# Altium PCB PCB1.PcbDoc (part 2 of 4)
Units mil, origin at the board's own origin, x right, y up, seen from the top; angles counter-clockwise.
Board outline 6000 x 4000 mil, 2 copper layers (Top Layer, Bottom Layer); 7 components, 0 nets, 14 pads, 0 vias.
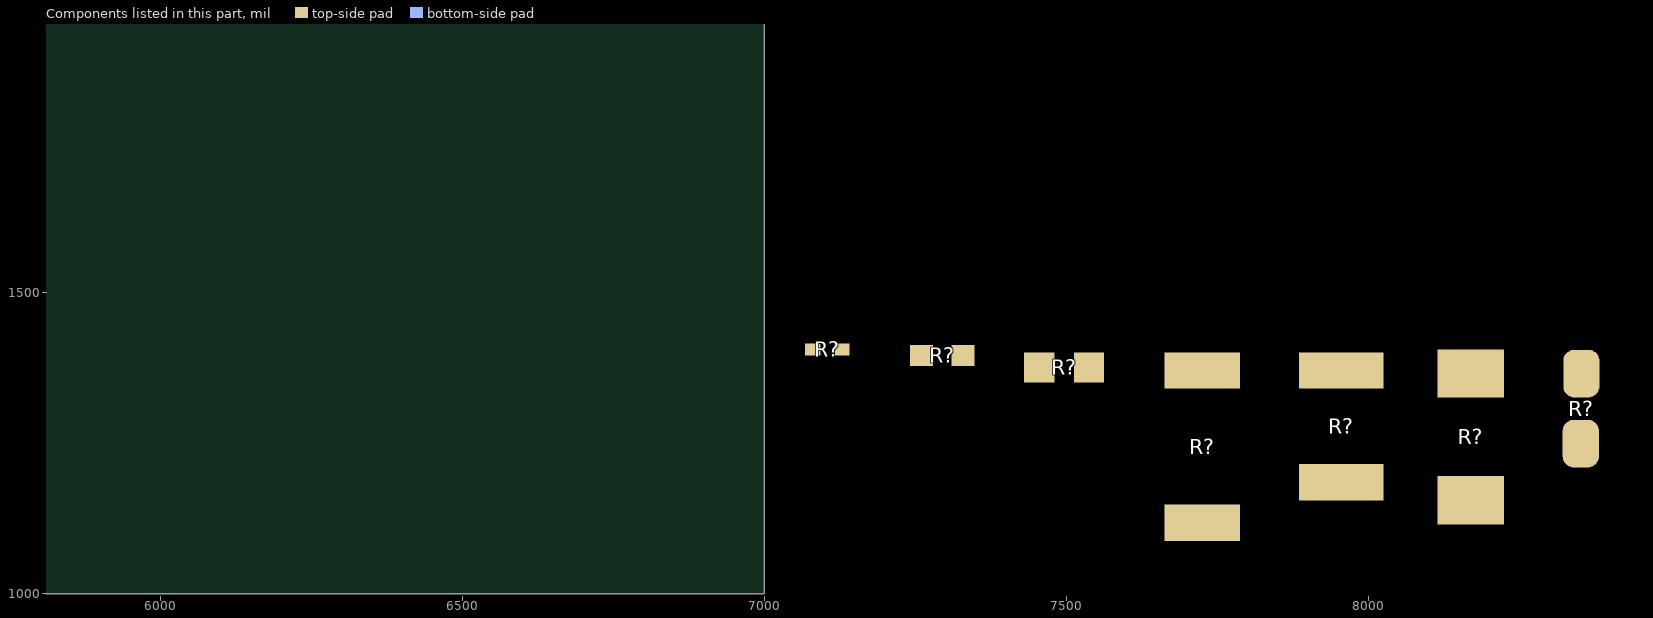
[diagram p2: the components of this part, seen from the top]

## Nets (pads, with @x,y where several pads share a name; then routed paths per layer and width w, separated by ;. In a path a pad name is that pad's centre, name@x,y a point inside that pad or via, vN(x,y) a via of type N, cw(c..) or ccw(c..) an arc to the next point about the centre after c; other vN are vias at no path point) (continued)
copper on no net: (continued)
  Top Layer w1: 5868,1638 5873,1638 ; 5868,1639 5873,1639 ; 5868,1640 5873,1640 ; 5868,1641 5872,1641 ; 5868,1642 5872,1642 ; 5868,1643 5872,1643 ; 5868,1644 5872,1644 ; 5868,1645 5872,1645 ; 5868,1646 5872,1646 ; 5868,1647 5872,1647 ; 5868,1648 5872,1648 ; 5868,1649 5872,1649 ; 5868,1650 5872,1650 ; 5868,1651 5872,1651 ; 5868,1652 5872,1652 ; 5868,1653 5872,1653 ; 5868,1654 5872,1654 ; 5868,1655 5872,1655 ; 5868,1656 5872,1656 ; 5868,1657 5872,1657 ; 5868,1658 5872,1658 ; 5868,1659 5872,1659 ; 5868,1660 5872,1660 ; 5868,1661 5872,1661 ; 5868,1662 5872,1662 ; 5868,1663 5872,1663 ; 5868,1664 5872,1664 ; 5868,1665 5872,1665 ; 5868,1666 5872,1666 ; 5868,1667 5872,1667 ; 5868,1668 5873,1668 ; 5868,1669 5873,1669 ; 5869,1627 5873,1627 ; 5869,1628 5873,1628 ; 5869,1629 5873,1629 ; 5869,1630 5873,1630 ; 5869,1631 5873,1631 ; 5869,1632 5873,1632 ; 5869,1633 5873,1633 ; 5869,1634 5873,1634 ; 5869,1635 5873,1635 ; 5869,1636 5873,1636 ; 5869,1637 5873,1637 ; 5869,1670 5873,1670 ; 5869,1671 5873,1671 ; 5869,1672 5873,1672 ; 5869,1673 5873,1673 ; 5869,1674 5873,1674 ; 5869,1675 5873,1675 ; 5869,1676 5873,1676 ; 5869,1677 5873,1677 ; 5869,1678 5873,1678 ; 5869,1679 5873,1679 ; 5869,1680 5873,1680 ; 5869,1681 5873,1681 ; 5870,1618 5875,1618 ; 5870,1619 5875,1619 ; 5870,1620 5875,1620 ; 5870,1621 5874,1621 ; 5870,1622 5874,1622 ; 5870,1623 5874,1623 ; 5870,1624 5874,1624 ; 5870,1625 5874,1625 ; 5870,1626 5874,1626 ; 5870,1682 5874,1682 ; 5870,1683 5874,1683 ; 5870,1684 5874,1684 ; 5870,1685 5874,1685 ; 5870,1686 5874,1686 ; 5870,1687 5875,1687 ; 5870,1688 5875,1688 ; 5870,1689 5875,1689 ; 5870,1690 5875,1690 ; 5871,1613 5875,1613 ; 5871,1614 5875,1614 ; 5871,1615 5875,1615 ; 5871,1616 5875,1616 ; 5871,1617 5875,1617 ; 5871,1691 5875,1691 ; 5871,1692 5875,1692 ; 5871,1693 5875,1693 ; 5871,1694 5875,1694 ; 5872,1607 5877,1607 ; 5872,1608 5877,1608 ; 5872,1609 5876,1609 ; 5872,1610 5876,1610 ; 5872,1611 5876,1611 ; 5872,1612 5876,1612 ; 5872,1695 5876,1695 ; 5872,1696 5876,1696 ; 5872,1697 5876,1697 ; 5872,1698 5876,1698 ; 5872,1699 5877,1699 ; 5872,1700 5877,1700 ; 5873,1603 5878,1603 ; 5873,1604 5877,1604 ; 5873,1605 5877,1605 ; 5873,1606 5877,1606 ; 5873,1701 5877,1701 ; 5873,1702 5877,1702 ; 5873,1703 5877,1703 ; 5873,1704 5877,1704 ; 5874,1598 5879,1598 ; 5874,1599 5879,1599 ; 5874,1600 5878,1600 ; 5874,1601 5878,1601 ; 5874,1602 5878,1602 ; 5874,1705 5878,1705 ; 5874,1706 5878,1706 ; 5874,1707 5878,1707 ; 5874,1708 5879,1708 ; 5874,1709 5879,1709 ; 5875,1595 5880,1595 ; 5875,1596 5879,1596 ; 5875,1597 5879,1597 ; 5875,1638 5877,1638 ; 5875,1639 5877,1639 ; 5875,1640 5877,1640 ; 5875,1641 5877,1641 ; 5875,1642 5877,1642 ; 5875,1643 5877,1643 ; 5875,1644 5877,1644 ; 5875,1645 5877,1645 ; 5875,1646 5877,1646 ; 5875,1647 5877,1647 ; 5875,1648 5877,1648 ; 5875,1649 5877,1649 ; 5875,1650 5877,1650 ; 5875,1651 5877,1651 ; 5875,1652 5877,1652 ; 5875,1653 5877,1653 ; 5875,1654 5877,1654 ; 5875,1655 5877,1655 ; 5875,1656 5877,1656 ; 5875,1657 5877,1657 ; 5875,1658 5877,1658 ; 5875,1659 5877,1659 ; 5875,1660 5877,1660 ; 5875,1661 5877,1661 ; 5875,1662 5877,1662 ; 5875,1663 5877,1663 ; 5875,1664 5877,1664 ; 5875,1665 5877,1665 ; 5875,1666 5877,1666 ; 5875,1667 5877,1667 ; 5875,1668 5877,1668 ; 5875,1669 5877,1669 ; 5875,1670 5877,1670 ; 5875,1671 5877,1671 ; 5875,1710 5879,1710 ; 5875,1711 5879,1711 ; 5875,1712 5880,1712 ; 5875,1713 5880,1713 ; 5876,1591 5881,1591 ; 5876,1592 5880,1592 ; 5876,1593 5880,1593 ; 5876,1594 5880,1594 ; 5876,1629 5878,1629 ; 5876,1630 5878,1630 ; 5876,1631 5878,1631 ; 5876,1632 5878,1632 ; 5876,1633 5878,1633 ; 5876,1634 5877,1634 ; 5876,1635 5877,1635 ; 5876,1636 5877,1636 ; 5876,1637 5877,1637 ; 5876,1672 5877,1672 ; 5876,1673 5877,1673 ; 5876,1674 5878,1674 ; 5876,1675 5878,1675 ; 5876,1676 5878,1676 ; 5876,1677 5878,1677 ; 5876,1678 5878,1678 ; 5876,1679 5878,1679 ; 5876,1714 5880,1714 ; 5876,1715 5880,1715 ; 5876,1716 5880,1716 ; 5877,1587 5882,1587 ; 5877,1588 5882,1588 ; 5877,1589 5881,1589 ; 5877,1590 5881,1590 ; 5877,1620 5879,1620 ; 5877,1621 5879,1621 ; 5877,1622 5879,1622 ; 5877,1623 5879,1623 ; 5877,1624 5879,1624 ; 5877,1625 5879,1625 ; 5877,1626 5879,1626 ; 5877,1627 5879,1627 ; 5877,1628 5878,1628 ; 5877,1680 5879,1680 ; 5877,1681 5879,1681 ; 5877,1682 5879,1682 ; 5877,1683 5879,1683 ; 5877,1684 5879,1684 ; 5877,1685 5879,1685 ; 5877,1686 5879,1686 ; 5877,1687 5879,1687 ; 5877,1688 5879,1688 ; 5877,1717 5881,1717 ; 5877,1718 5881,1718 ; 5877,1719 5882,1719 ; 5877,1720 5882,1720 ; 5878,1584 5883,1584 ; 5878,1585 5882,1585 ; 5878,1586 5882,1586 ; 5878,1615 5880,1615 ; 5878,1616 5880,1616 ; 5878,1617 5880,1617 ; 5878,1618 5879,1618 ; 5878,1619 5879,1619 ; 5878,1689 5879,1689 ; 5878,1690 5880,1690 ; 5878,1691 5880,1691 ; 5878,1692 5880,1692 ; 5878,1693 5880,1693 ; 5878,1721 5882,1721 ; 5878,1722 5882,1722 ; 5878,1723 5882,1723 ; 5879,1581 5884,1581 ; 5879,1582 5884,1582 ; 5879,1583 5883,1583 ; 5879,1608 5881,1608 ; 5879,1609 5881,1609 ; 5879,1610 5881,1610 ; 5879,1611 5881,1611 ; 5879,1612 5881,1612 ; 5879,1613 5881,1613 ; 5879,1614 5880,1614 ; 5879,1694 5881,1694 ; 5879,1695 5881,1695 ; 5879,1696 5881,1696 ; 5879,1697 5881,1697 ; 5879,1698 5881,1698 ; 5879,1699 5881,1699 ; 5879,1724 5883,1724 ; 5879,1725 5884,1725 ; 5879,1726 5884,1726 ; 5879,1727 5884,1727 ; 5880,1578 5885,1578 ; 5880,1579 5884,1579 ; 5880,1580 5884,1580 ; 5880,1605 5882,1605 ; 5880,1606 5882,1606 ; 5880,1607 5882,1607 ; 5880,1700 5882,1700 ; 5880,1701 5882,1701 ; 5880,1702 5882,1702 ; 5880,1703 5882,1703 ; 5880,1728 5884,1728 ; 5880,1729 5885,1729 ; 5881,1575 5886,1575 ; 5881,1576 5886,1576 ; 5881,1577 5885,1577 ; 5881,1600 5883,1600 ; 5881,1601 5883,1601 ; 5881,1602 5883,1602 ; 5881,1603 5883,1603 ; 5881,1604 5882,1604 ; 5881,1704 5882,1704 ; 5881,1705 5883,1705 ; 5881,1706 5883,1706 ; 5881,1707 5883,1707 ; 5881,1708 5883,1708 ; 5881,1730 5885,1730 ; 5881,1731 5885,1731 ; 5881,1732 5886,1732 ; 5882,1573 5887,1573 ; 5882,1574 5886,1574 ; 5882,1596 5884,1596 ; 5882,1597 5884,1597 ; 5882,1598 5884,1598 ; 5882,1599 5884,1599 ; 5882,1709 5884,1709 ; 5882,1710 5884,1710 ; 5882,1711 5884,1711 ; 5882,1733 5886,1733 ; 5882,1734 5887,1734 ; 5882,1735 5887,1735 ; 5883,1569 5888,1569 ; 5883,1570 5888,1570 ; 5883,1571 5887,1571 ; 5883,1572 5887,1572 ; 5883,1592 5885,1592 ; 5883,1593 5885,1593 ; 5883,1594 5885,1594 ; 5883,1595 5885,1595 ; 5883,1712 5884,1712 ; 5883,1713 5885,1713 ; 5883,1714 5885,1714 ; 5883,1715 5885,1715 ; 5883,1736 5887,1736 ; 5883,1737 5888,1737 ; 5883,1738 5888,1738 ; 5884,1567 5889,1567 ; 5884,1568 5889,1568 ; 5884,1589 5886,1589 ; 5884,1590 5886,1590 ; 5884,1591 5886,1591 ; 5884,1716 5886,1716 ; 5884,1717 5886,1717 ; 5884,1718 5886,1718 ; 5884,1719 5886,1719 ; 5884,1739 5889,1739 ; 5884,1740 5889,1740 ; 5885,1565 5890,1565 ; 5885,1566 5889,1566 ; 5885,1586 5887,1586 ; 5885,1587 5887,1587 ; 5885,1588 5886,1588 ; 5885,1720 5887,1720 ; 5885,1721 5887,1721 ; 5885,1741 5889,1741 ; 5885,1742 5889,1742 ; 5886,1562 5891,1562 ; 5886,1563 5891,1563 ; 5886,1564 5890,1564 ; 5886,1582 5888,1582 ; 5886,1583 5888,1583 ; 5886,1584 5888,1584 ; 5886,1585 5888,1585 ; 5886,1722 5888,1722 ; 5886,1723 5888,1723 ; 5886,1724 5888,1724 ; 5886,1725 5888,1725 ; 5886,1743 5890,1743 ; 5886,1744 5891,1744 ; 5886,1745 5891,1745 ; 5887,1560 5892,1560 ; 5887,1561 5891,1561 ; 5887,1580 5889,1580 ; 5887,1581 5889,1581 ; 5887,1726 5889,1726 ; 5887,1727 5889,1727 ; 5887,1746 5891,1746 ; 5887,1747 5892,1747 ; 5888,1558 5893,1558 ; 5888,1559 5893,1559 ; 5888,1576 5891,1576 ; 5888,1577 5890,1577 ; 5888,1578 5890,1578 ; 5888,1579 5890,1579 ; 5888,1728 5889,1728 ; 5888,1729 5890,1729 ; 5888,1730 5890,1730 ; 5888,1731 5890,1731 ; 5888,1748 5892,1748 ; 5888,1749 5893,1749 ; 5888,1750 5893,1750 ; 5889,1556 5894,1556 ; 5889,1557 5893,1557 ; 5889,1575 5891,1575 ; 5889,1654 5915,1654 ; 5889,1655 5915,1655 ; 5889,1656 5914,1656 ; 5889,1657 5899,1657 ; 5889,1732 5891,1732 ; 5889,1733 5891,1733 ; 5889,1751 5894,1751 ; 5889,1752 5894,1752 ; 5890,1553 5895,1553 ; 5890,1554 5895,1554 ; 5890,1555 5895,1555 ; 5890,1571 5893,1571 ; 5890,1572 5892,1572 ; 5890,1573 5892,1573 ; 5890,1574 5891,1574 ; 5890,1631 5894,1631 ; 5890,1632 5894,1632 ; 5890,1633 5894,1633 ; 5890,1634 5893,1634 ; 5890,1635 5893,1635 ; 5890,1636 5893,1636 ; 5890,1658 5899,1658 ; 5890,1670 5915,1670 ; 5890,1671 5915,1671 ; 5890,1672 5915,1672 ; 5890,1734 5892,1734 ; 5890,1735 5892,1735 ; 5890,1736 5892,1736 ; 5890,1753 5895,1753 ; 5890,1754 5895,1754 ; 5891,1552 5896,1552 ; 5891,1569 5893,1569 ; 5891,1570 5893,1570 ; 5891,1625 5895,1625 ; 5891,1626 5895,1626 ; 5891,1627 5894,1627 ; 5891,1628 5894,1628 ; 5891,1629 5894,1629 ; 5891,1630 5894,1630 ; 5891,1637 5893,1637 ; 5891,1673 5893,1673 ; 5891,1737 5893,1737 ; 5891,1738 5893,1738 ; 5891,1755 5896,1755 ; 5891,1756 5896,1756 ; 5892,1549 5897,1549 ; 5892,1550 5897,1550 ; 5892,1551 5896,1551 ; 5892,1567 5894,1567 ; 5892,1568 5894,1568 ; 5892,1619 5896,1619 ; 5892,1620 5905,1620 ; 5892,1621 5912,1621 ; 5892,1622 5917,1622 ; 5892,1623 5917,1623 ; 5892,1624 5895,1624 ; 5892,1659 5900,1659 ; 5892,1689 5896,1689 ; 5892,1690 5896,1690 ; 5892,1691 5896,1691 ; 5892,1739 5894,1739 ; 5892,1740 5894,1740 ; 5892,1741 5895,1741 ; 5892,1757 5897,1757 ; 5892,1758 5897,1758 ; 5893,1547 5898,1547 ; 5893,1548 5898,1548 ; 5893,1564 5895,1564 ; 5893,1565 5895,1565 ; 5893,1566 5895,1566 ; 5893,1660 5901,1660 ; 5893,1688 5895,1688 ; 5893,1692 5896,1692 ; 5893,1693 5896,1693 ; 5893,1694 5897,1694 ; 5893,1695 5918,1695 ; 5893,1742 5895,1742 ; 5893,1743 5895,1743 ; 5893,1759 5898,1759 ; 5893,1760 5898,1760 ; 5894,1546 5899,1546 ; 5894,1562 5896,1562 ; 5894,1563 5896,1563 ; 5894,1696 5914,1696 ; 5894,1697 5909,1697 ; 5894,1698 5904,1698 ; 5894,1699 5900,1699 ; 5894,1700 5898,1700 ; 5894,1744 5896,1744 ; 5894,1745 5896,1745 ; 5894,1761 5899,1761 ; 5894,1762 5899,1762 ; 5895,1543 5900,1543 ; 5895,1544 5900,1544 ; 5895,1545 5899,1545 ; 5895,1560 5897,1560 ; 5895,1561 5897,1561 ; 5895,1661 5903,1661 ; 5895,1701 5898,1701 ; 5895,1702 5898,1702 ; 5895,1703 5898,1703 ; 5895,1704 5899,1704 ; 5895,1705 5899,1705 ; 5895,1746 5897,1746 ; 5895,1747 5897,1747 ; 5895,1748 5897,1748 ; 5895,1763 5900,1763 ; 5895,1764 5900,1764 ; 5896,1542 5901,1542 ; 5896,1558 5898,1558 ; 5896,1559 5898,1559 ; 5896,1706 5899,1706 ; 5896,1707 5899,1707 ; 5896,1749 5898,1749 ; 5896,1750 5899,1750 ; 5896,1765 5901,1765 ; 5897,1540 5902,1540 ; 5897,1541 5902,1541 ; 5897,1555 5900,1555 ; 5897,1556 5899,1556 ; 5897,1557 5899,1557 ; 5897,1594 5901,1594 ; 5897,1595 5901,1595 ; 5897,1596 5901,1596 ; 5897,1597 5901,1597 ; 5897,1598 5902,1598 ; 5897,1599 5902,1599 ; 5897,1662 5905,1662 ; 5897,1751 5899,1751 ; 5897,1752 5899,1752 ; 5897,1766 5902,1766 ; 5897,1767 5902,1767 ; 5897,1768 5903,1768 ; 5898,1538 5903,1538 ; 5898,1539 5903,1539 ; 5898,1554 5900,1554 ; 5898,1592 5902,1592 ; 5898,1593 5902,1593 ; 5898,1600 5903,1600 ; 5898,1601 5904,1601 ; 5898,1753 5900,1753 ; 5898,1754 5900,1754 ; 5898,1769 5903,1769 ; 5899,1536 5905,1536 ; 5899,1537 5904,1537 ; 5899,1552 5907,1552 ; 5899,1553 5910,1553 ; 5899,1590 5904,1590 ; 5899,1591 5903,1591 ; 5899,1602 5903,1602 ; 5899,1663 5907,1663 ; 5899,1755 5901,1755 ; 5899,1756 5901,1756 ; 5899,1770 5904,1770 ; 5899,1771 5904,1771 ; 5900,1535 5905,1535 ; 5900,1550 5903,1550 ; 5900,1551 5905,1551 ; 5900,1589 5906,1589 ; 5900,1603 5902,1603 ; 5900,1635 5904,1635 ; 5900,1636 5904,1636 ; 5900,1653 5915,1653 ; 5900,1757 5902,1757 ; 5900,1758 5902,1758 ; 5900,1772 5905,1772 ; 5900,1773 5905,1773 ; 5901,1533 5906,1533 ; 5901,1534 5906,1534 ; 5901,1548 5903,1548 ; 5901,1549 5903,1549 ; 5901,1587 5918,1587 ; 5901,1588 5919,1588 ; 5901,1604 5902,1604 ; 5901,1624 5917,1624 ; 5901,1628 5905,1628 ; 5901,1629 5905,1629 ; 5901,1630 5905,1630 ; 5901,1631 5904,1631 ; 5901,1632 5904,1632 ; 5901,1633 5904,1633 ; 5901,1634 5904,1634 ; 5901,1637 5904,1637 ; 5901,1664 5909,1664 ; 5901,1669 5903,1669 ; 5901,1722 5916,1722 ; 5901,1723 5909,1723 ; 5901,1724 5907,1724 ; 5901,1759 5903,1759 ; 5901,1760 5904,1760 ; 5901,1774 5906,1774 ; 5902,1531 5908,1531 ; 5902,1532 5907,1532 ; 5902,1546 5904,1546 ; 5902,1547 5904,1547 ; 5902,1625 5906,1625 ; 5902,1626 5905,1626 ; 5902,1627 5905,1627 ; 5902,1665 5911,1665 ; 5902,1725 5906,1725 ; 5902,1726 5906,1726 ; 5902,1727 5906,1727 ; 5902,1761 5904,1761 ; 5902,1762 5904,1762 ; 5902,1775 5907,1775 ; 5902,1776 5907,1776 ; 5903,1530 5908,1530 ; 5903,1544 5906,1544 ; 5903,1545 5905,1545 ; 5903,1586 5916,1586 ; 5903,1694 5919,1694 ; 5903,1721 5916,1721 ; 5903,1728 5906,1728 ; 5903,1729 5907,1729 ; 5903,1763 5905,1763 ; 5903,1777 5908,1777 ; 5904,1528 5909,1528 ; 5904,1529 5909,1529 ; 5904,1542 5911,1542 ; 5904,1543 5913,1543 ; 5904,1554 5912,1554 ; 5904,1730 5907,1730 ; 5904,1731 5908,1731 ; 5904,1732 5908,1732 ; 5904,1764 5906,1764 ; 5904,1765 5906,1765 ; 5904,1778 5909,1778 ; 5904,1779 5909,1779 ; 5905,1527 5910,1527 ; 5905,1541 5909,1541 ; 5905,1666 5912,1666 ; 5905,1669 5915,1669 ; 5905,1733 5909,1733 ; 5905,1734 5909,1734 ; 5905,1766 5907,1766 ; 5905,1767 5908,1767 ; 5905,1780 5910,1780 ; 5905,1781 5911,1781 ; 5906,1525 5912,1525 ; 5906,1526 5911,1526 ; 5906,1539 5908,1539 ; 5906,1540 5908,1540 ; 5906,1555 5915,1555 ; 5906,1585 5912,1585 ; 5906,1667 5914,1667 ; 5906,1668 5915,1668 ; 5906,1720 5917,1720 ; 5906,1735 5918,1735 ; 5906,1736 5918,1736 ; 5906,1768 5908,1768 ; 5906,1769 5909,1769 ; 5906,1782 5911,1782 ; 5907,1524 5912,1524 ; 5907,1537 5909,1537 ; 5907,1538 5909,1538 ; 5907,1693 5919,1693 ; 5907,1737 5917,1737 ; 5907,1770 5909,1770 ; 5907,1783 5912,1783 ; 5907,1784 5913,1784 ; 5908,1522 5914,1522 ; 5908,1523 5913,1523 ; 5908,1535 5911,1535 ; 5908,1536 5910,1536 ; 5908,1544 5915,1544 ; 5908,1719 5920,1719 ; 5908,1738 5916,1738 ; 5908,1771 5910,1771 ; 5908,1772 5911,1772 ; 5908,1785 5913,1785 ; 5909,1521 5914,1521 ; 5909,1534 5912,1534 ; 5909,1556 5917,1556 ; 5909,1773 5911,1773 ; 5909,1774 5912,1774 ; 5909,1786 5914,1786 ; 5909,1787 5915,1787 ; 5910,1519 5916,1519 ; 5910,1520 5915,1520 ; 5910,1532 5915,1532 ; 5910,1533 5918,1533 ; 5910,1545 5917,1545 ; 5910,1589 5921,1589 ; 5910,1739 5913,1739 ; 5910,1775 5912,1775 ; 5910,1788 5916,1788 ; 5911,1518 5917,1518 ; 5911,1531 5914,1531 ; 5911,1557 5920,1557 ; 5911,1625 5917,1625 ; 5911,1718 5922,1718 ; 5911,1776 5913,1776 ; 5911,1777 5914,1777 ; 5911,1789 5916,1789 ; 5911,1790 5917,1790 ; 5912,1517 5917,1517 ; 5912,1529 5914,1529 ; 5912,1530 5914,1530 ; 5912,1546 5919,1546 ; 5912,1634 5916,1634 ; 5912,1635 5916,1635 ; 5912,1636 5916,1636 ; 5912,1637 5915,1637 ; 5912,1638 5915,1638 ; 5912,1639 5915,1639 ; 5912,1640 5915,1640 ; 5912,1692 5919,1692 ; 5912,1717 5925,1717 ; 5912,1778 5914,1778 ; 5912,1791 5918,1791 ; 5913,1515 5919,1515 ; 5913,1516 5918,1516 ; 5913,1528 5915,1528 ; 5913,1534 5919,1534 ; 5913,1604 5921,1604 ; 5913,1605 5921,1605 ; 5913,1606 5919,1606 ; 5913,1607 5918,1607 ; 5913,1626 5917,1626 ; 5913,1627 5917,1627 ; 5913,1628 5916,1628 ; 5913,1629 5916,1629 ; 5913,1630 5916,1630 ; 5913,1631 5916,1631 ; 5913,1632 5916,1632 ; 5913,1633 5916,1633 ; 5913,1723 5916,1723 ; 5913,1724 5917,1724 ; 5913,1779 5915,1779 ; 5913,1780 5916,1780 ; 5913,1792 5918,1792 ; 5914,1514 5920,1514 ; 5914,1526 5917,1526 ; 5914,1527 5916,1527 ; 5914,1535 5921,1535 ; 5914,1547 5921,1547 ; 5914,1558 5922,1558 ; 5914,1590 5921,1590 ; 5914,1725 5918,1725 ; 5914,1726 5920,1726 ; 5914,1734 5918,1734 ; 5914,1781 5916,1781 ; 5914,1793 5919,1793 ; 5915,1512 5921,1512 ; 5915,1513 5920,1513 ; 5915,1525 5917,1525 ; 5915,1727 5922,1727 ; 5915,1728 5928,1728 ; 5915,1729 5930,1729 ; 5915,1730 5931,1730 ; 5915,1731 5918,1731 ; 5915,1732 5918,1732 ; 5915,1733 5918,1733 ; 5915,1782 5917,1782 ; 5915,1783 5918,1783 ; 5915,1794 5920,1794 ; 5915,1795 5921,1795 ; 5916,1511 5922,1511 ; 5916,1524 5924,1524 ; 5916,1536 5923,1536 ; 5916,1548 5923,1548 ; 5916,1559 5924,1559 ; 5916,1591 5922,1591 ; 5916,1603 5922,1603 ; 5916,1691 5918,1691 ; 5916,1716 5925,1716 ; 5916,1784 5919,1784 ; 5916,1796 5922,1796 ; 5917,1510 5923,1510 ; 5917,1522 5921,1522 ; 5917,1523 5922,1523 ; 5917,1592 5923,1592 ; 5917,1785 5919,1785 ; 5917,1786 5920,1786 ; 5917,1797 5923,1797 ; 5917,1798 5923,1798 ; 5918,1509 5924,1509 ; 5918,1521 5920,1521 ; 5918,1537 5925,1537 ; 5918,1549 5925,1549 ; 5918,1560 5927,1560 ; 5918,1593 5923,1593 ; 5918,1602 5922,1602 ; 5918,1715 5925,1715 ; 5918,1787 5921,1787 ; 5918,1799 5924,1799 ; 5919,1507 5925,1507 ; 5919,1508 5924,1508 ; 5919,1519 5922,1519 ; 5919,1520 5921,1520 ; 5919,1525 5925,1525 ; 5919,1594 5923,1594 ; 5919,1600 5923,1600 ; 5919,1601 5923,1601 ; 5919,1762 5948,1762 ; 5919,1788 5921,1788 ; 5919,1800 5925,1800 ; 5920,1506 5926,1506 ; 5920,1518 5922,1518 ; 5920,1538 5926,1538 ; 5920,1550 5927,1550 ; 5920,1595 5923,1595 ; 5920,1596 5923,1596 ; 5920,1597 5924,1597 ; 5920,1598 5924,1598 ; 5920,1599 5923,1599 ; 5920,1761 5926,1761 ; 5920,1763 5942,1763 ; 5920,1764 5937,1764 ; 5920,1789 5922,1789 ; 5920,1790 5923,1790 ; 5920,1801 5926,1801 ; 5921,1505 5927,1505 ; 5921,1517 5923,1517 ; 5921,1526 5927,1526 ; 5921,1539 5928,1539 ; 5921,1561 5929,1561 ; 5921,1641 5923,1641 ; 5921,1642 5923,1642 ; 5921,1643 5923,1643 ; 5921,1644 5923,1644 ; 5921,1645 5923,1645 ; 5921,1646 5923,1646 ; 5921,1647 5923,1647 ; 5921,1648 5923,1648 ; 5921,1649 5923,1649 ; 5921,1650 5923,1650 ; 5921,1651 5923,1651 ; 5921,1652 5923,1652 ; 5921,1653 5923,1653 ; 5921,1654 5923,1654 ; 5921,1655 5923,1655 ; 5921,1656 5923,1656 ; 5921,1657 5923,1657 ; 5921,1658 5923,1658 ; 5921,1659 5923,1659 ; 5921,1660 5923,1660 ; 5921,1661 5923,1661 ; 5921,1662 5923,1662 ; 5921,1663 5923,1663 ; 5921,1664 5923,1664 ; 5921,1665 5923,1665 ; 5921,1666 5923,1666 ; 5921,1714 5925,1714 ; 5921,1760 5926,1760 ; 5921,1765 5930,1765 ; 5921,1766 5925,1766 ; 5921,1791 5924,1791 ; 5921,1802 5927,1802 ; 5922,1504 5928,1504 ; 5922,1515 5931,1515 ; 5922,1516 5924,1516 ; 5922,1551 5929,1551 ; 5922,1630 5924,1630 ; 5922,1631 5924,1631 ; 5922,1632 5924,1632 ; 5922,1633 5924,1633 ; 5922,1634 5924,1634 ; 5922,1635 5924,1635 ; 5922,1636 5924,1636 ; 5922,1637 5924,1637 ; 5922,1638 5923,1638 ; 5922,1639 5923,1639 ; 5922,1640 5923,1640 ; 5922,1667 5923,1667 ; 5922,1668 5923,1668 ; 5922,1669 5923,1669 ; 5922,1670 5924,1670 ; 5922,1671 5924,1671 ; 5922,1672 5924,1672 ; 5922,1673 5924,1673 ; 5922,1674 5924,1674 ; 5922,1675 5924,1675 ; 5922,1676 5924,1676 ; 5922,1677 5924,1677 ; 5922,1713 5924,1713 ; 5922,1731 5931,1731 ; 5922,1758 5927,1758 ; 5922,1759 5927,1759 ; 5922,1792 5924,1792 ; 5922,1803 5927,1803 ; 5922,1804 5928,1804 ; 5923,1503 5929,1503 ; 5923,1514 5929,1514 ; 5923,1527 5929,1527 ; 5923,1562 5932,1562 ; 5923,1624 5925,1624 ; 5923,1625 5925,1625 ; 5923,1626 5925,1626 ; 5923,1627 5925,1627 ; 5923,1628 5925,1628 ; 5923,1629 5925,1629 ; 5923,1678 5924,1678 ; 5923,1679 5925,1679 ; 5923,1680 5925,1680 ; 5923,1681 5925,1681 ; 5923,1682 5925,1682 ; 5923,1683 5925,1683 ; 5923,1757 5928,1757 ; 5923,1793 5925,1793 ; 5923,1805 5929,1805 ; 5924,1501 5931,1501 ; 5924,1502 5930,1502 ; 5924,1513 5928,1513 ; 5924,1528 5930,1528 ; 5924,1540 5930,1540 ; 5924,1552 5931,1552 ; 5924,1618 5926,1618 ; 5924,1619 5926,1619 ; 5924,1620 5926,1620 ; 5924,1621 5926,1621 ; 5924,1622 5926,1622 ; 5924,1623 5925,1623 ; 5924,1684 5925,1684 ; 5924,1685 5925,1685 ; 5924,1686 5926,1686 ; 5924,1687 5926,1687 ; 5924,1688 5926,1688 ; 5924,1689 5926,1689 ; 5924,1756 5929,1756 ; 5924,1794 5926,1794 ; 5924,1795 5927,1795 ; 5924,1806 5930,1806 ; 5925,1500 5931,1500 ; 5925,1512 5927,1512 ; 5925,1541 5932,1541 ; 5925,1614 5927,1614 ; 5925,1615 5927,1615 ; 5925,1616 5927,1616 ; 5925,1617 5927,1617 ; 5925,1690 5926,1690 ; 5925,1691 5927,1691 ; 5925,1692 5927,1692 ; 5925,1693 5927,1693 ; 5925,1732 5932,1732 ; 5925,1755 5930,1755 ; 5925,1796 5928,1796 ; 5925,1807 5931,1807 ; 5926,1499 5932,1499 ; 5926,1510 5929,1510 ; 5926,1511 5928,1511 ; 5926,1516 5932,1516 ; 5926,1529 5932,1529 ; 5926,1553 5934,1553 ; 5926,1563 5934,1563 ; 5926,1610 5928,1610 ; 5926,1611 5928,1611 ; 5926,1612 5928,1612 ; 5926,1613 5927,1613 ; 5926,1650 5951,1650 ; 5926,1651 5951,1651 ; 5926,1652 5951,1652 ; 5926,1653 5951,1653 ; 5926,1654 5951,1654 ; 5926,1655 5951,1655 ; 5926,1656 5951,1656 ; 5926,1657 5952,1657 ; 5926,1694 5927,1694 ; 5926,1695 5928,1695 ; 5926,1696 5928,1696 ; 5926,1697 5928,1697 ; 5926,1698 5928,1698 ; 5926,1753 5936,1753 ; 5926,1754 5931,1754 ; 5926,1797 5928,1797 ; 5926,1808 5932,1808 ; 5927,1498 5933,1498 ; 5927,1509 5930,1509 ; 5927,1530 5934,1530 ; 5927,1542 5934,1542 ; 5927,1606 5929,1606 ; 5927,1607 5929,1607 ; 5927,1608 5929,1608 ; 5927,1609 5928,1609 ; 5927,1636 5955,1636 ; 5927,1637 5954,1637 ; 5927,1638 5954,1638 ; 5927,1639 5953,1639 ; 5927,1640 5953,1640 ; 5927,1641 5952,1641 ; 5927,1642 5952,1642 ; 5927,1643 5952,1643 ; 5927,1644 5951,1644 ; 5927,1645 5951,1645 ; 5927,1646 5951,1646 ; 5927,1647 5951,1647 ; 5927,1648 5951,1648 ; 5927,1649 5951,1649 ; 5927,1658 5952,1658 ; 5927,1659 5952,1659 ; 5927,1660 5952,1660 ; 5927,1661 5953,1661 ; 5927,1662 5953,1662 ; 5927,1663 5954,1663 ; 5927,1664 5954,1664 ; 5927,1665 5954,1665 ; 5927,1666 5955,1666 ; 5927,1667 5956,1667 ; 5927,1668 5956,1668 ; 5927,1669 5957,1669 ; 5927,1670 5957,1670 ; 5927,1671 5958,1671 ; 5927,1699 5929,1699 ; 5927,1700 5929,1700 ; 5927,1701 5929,1701 ; 5927,1702 5929,1702 ; 5927,1752 5936,1752 ; 5927,1798 5929,1798 ; 5927,1809 5933,1809 ; 5928,1497 5934,1497 ; 5928,1508 5930,1508 ; 5928,1517 5933,1517 ; 5928,1564 5936,1564 ; 5928,1602 5930,1602 ; 5928,1603 5930,1603 ; 5928,1604 5930,1604 ; 5928,1605 5929,1605 ; 5928,1627 5963,1627 ; 5928,1628 5962,1628 ; 5928,1629 5961,1629 ; 5928,1630 5960,1630 ; 5928,1631 5959,1631 ; 5928,1632 5958,1632 ; 5928,1633 5957,1633 ; 5928,1634 5956,1634 ; 5928,1635 5956,1635 ; 5928,1672 5959,1672 ; 5928,1673 5959,1673 ; 5928,1674 5960,1674 ; 5928,1675 5961,1675 ; 5928,1676 5962,1676 ; 5928,1677 5963,1677 ; 5928,1678 5964,1678 ; 5928,1679 5965,1679 ; 5928,1680 5966,1680 ; 5928,1703 5930,1703 ; 5928,1704 5930,1704 ; 5928,1705 5930,1705 ; 5928,1750 5934,1750 ; 5928,1751 5935,1751 ; 5928,1799 5930,1799 ; 5928,1800 5931,1800 ; 5928,1810 5934,1810 ; 5928,1811 5935,1811 ; 5929,1496 5935,1496 ; 5929,1507 5931,1507 ; 5929,1518 5935,1518 ; 5929,1531 5935,1531 ; 5929,1543 5935,1543 ; 5929,1554 5936,1554 ; 5929,1599 5931,1599 ; 5929,1600 5931,1600 ; 5929,1601 5931,1601 ; 5929,1622 5968,1622 ; 5929,1623 5967,1623 ; 5929,1624 5966,1624 ; 5929,1625 5965,1625 ; 5929,1626 5964,1626 ; 5929,1681 5967,1681 ; 5929,1682 5968,1682 ; 5929,1683 5969,1683 ; 5929,1684 5970,1684 ; 5929,1685 5971,1685 ; 5929,1686 5972,1686 ; 5929,1706 5931,1706 ; 5929,1707 5931,1707 ; 5929,1708 5931,1708 ; 5929,1709 5932,1709 ; 5929,1749 5935,1749 ; 5929,1801 5932,1801 ; 5930,1495 5936,1495 ; 5930,1506 5938,1506 ; 5930,1532 5937,1532 ; 5930,1555 5938,1555 ; 5930,1596 5932,1596 ; 5930,1597 5932,1597 ; 5930,1598 5932,1598 ; 5930,1617 5973,1617 ; 5930,1618 5972,1618 ; 5930,1619 5971,1619 ; 5930,1620 5970,1620 ; 5930,1621 5969,1621 ; 5930,1687 5973,1687 ; 5930,1688 5974,1688 ; 5930,1689 5975,1689 ; 5930,1690 5976,1690 ; 5930,1691 5977,1691 ; 5930,1710 5932,1710 ; 5930,1711 5932,1711 ; 5930,1733 5932,1733 ; 5930,1748 5935,1748 ; 5930,1802 5933,1802 ; 5930,1812 5936,1812 ; 5930,1813 5937,1813 ; 5931,1494 5937,1494 ; 5931,1504 5935,1504 ; 5931,1505 5936,1505 ; 5931,1519 5936,1519 ; 5931,1544 5937,1544 ; 5931,1565 5939,1565 ; 5931,1593 5933,1593 ; 5931,1594 5933,1594 ; 5931,1595 5933,1595 ; 5931,1612 5978,1612 ; 5931,1613 5977,1613 ; 5931,1614 5976,1614 ; 5931,1615 5975,1615 ; 5931,1616 5974,1616 ; 5931,1692 5978,1692 ; 5931,1693 5979,1693 ; 5931,1694 5980,1694 ; 5931,1695 5981,1695 ; 5931,1712 5933,1712 ; 5931,1713 5933,1713 ; 5931,1714 5933,1714 ; 5931,1747 5936,1747 ; 5931,1761 5948,1761 ; 5931,1803 5934,1803 ; 5931,1814 5938,1814 ; 5932,1493 5938,1493 ; 5932,1503 5935,1503 ; 5932,1520 5937,1520 ; 5932,1533 5938,1533 ; 5932,1591 5934,1591 ; 5932,1592 5934,1592 ; 5932,1609 5981,1609 ; 5932,1610 5980,1610 ; 5932,1611 5979,1611 ; 5932,1696 5982,1696 ; 5932,1697 5983,1697 ; 5932,1698 5984,1698 ; 5932,1699 5985,1699 ; 5932,1715 5934,1715 ; 5932,1716 5934,1716 ; 5932,1717 5934,1717 ; 5932,1745 5938,1745 ; 5932,1746 5937,1746 ; 5932,1804 5934,1804 ; 5932,1815 5938,1815 ; 5933,1492 5939,1492 ; 5933,1502 5936,1502 ; 5933,1521 5939,1521 ; 5933,1545 5939,1545 ; 5933,1556 5939,1556 ; 5933,1566 5941,1566 ; 5933,1588 5935,1588 ; 5933,1589 5935,1589 ; 5933,1590 5934,1590 ; 5933,1605 5985,1605 ; 5933,1606 5984,1606 ; 5933,1607 5983,1607 ; 5933,1608 5982,1608 ; 5933,1700 5986,1700 ; 5933,1701 5987,1701 ; 5933,1702 5988,1702 ; 5933,1703 5989,1703 ; 5933,1718 5935,1718 ; 5933,1719 5935,1719 ; 5933,1720 5936,1720 ; 5933,1744 5938,1744 ; 5933,1754 5937,1754 ; 5933,1755 5938,1755 ; 5933,1805 5935,1805 ; 5933,1816 5940,1816 ; 5934,1491 5940,1491 ; 5934,1501 5937,1501 ; 5934,1507 5939,1507 ; 5934,1534 5940,1534 ; 5934,1546 5941,1546 ; 5934,1557 5942,1557 ; 5934,1586 5936,1586 ; 5934,1587 5936,1587 ; 5934,1602 5988,1602 ; 5934,1603 5987,1603 ; 5934,1604 5986,1604 ; 5934,1704 5990,1704 ; 5934,1705 5991,1705 ; 5934,1706 5992,1706 ; 5934,1721 5936,1721 ; 5934,1722 5936,1722 ; 5934,1742 5937,1742 ; 5934,1743 5937,1743 ; 5934,1756 5938,1756 ; 5934,1806 5936,1806 ; 5934,1817 5940,1817 ; 5935,1489 5942,1489 ; 5935,1490 5941,1490 ; 5935,1500 5938,1500 ; 5935,1508 5940,1508 ; 5935,1522 5940,1522 ; 5935,1535 5942,1535 ; 5935,1583 5937,1583 ; 5935,1584 5937,1584 ; 5935,1585 5937,1585 ; 5935,1598 5992,1598 ; 5935,1599 5991,1599 ; 5935,1600 5990,1600 ; 5935,1601 5989,1601 ; 5935,1707 5993,1707 ; 5935,1708 5994,1708 ; 5935,1709 5995,1709 ; 5935,1723 5937,1723 ; 5935,1724 5937,1724 ; 5935,1757 5939,1757 ; 5935,1760 5948,1760 ; 5935,1807 5937,1807 ; 5935,1818 5942,1818 ; 5936,1488 5943,1488 ; 5936,1499 5938,1499 ; 5936,1509 5941,1509 ; 5936,1523 5942,1523 ; 5936,1547 5943,1547 ; 5936,1567 5945,1567 ; 5936,1581 5938,1581 ; 5936,1582 5938,1582 ; 5936,1596 5994,1596 ; 5936,1597 5993,1597 ; 5936,1710 5996,1710 ; 5936,1711 5997,1711 ; 5936,1712 5998,1712 ; 5936,1725 5938,1725 ; 5936,1726 5938,1726 ; 5936,1727 5938,1727 ; 5936,1758 5940,1758 ; 5936,1759 5947,1759 ; 5936,1808 5938,1808 ; 5936,1819 5943,1819 ; 5937,1498 5940,1498 ; 5937,1510 5943,1510 ; 5937,1536 5943,1536 ; 5937,1558 5944,1558 ; 5937,1579 5939,1579 ; 5937,1580 5939,1580 ; 5937,1593 5997,1593 ; 5937,1594 5996,1594 ; 5937,1595 5995,1595 ; 5937,1713 5999,1713 ; 5937,1714 6019,1714 ; 5937,1715 6018,1715 ; 5937,1728 5939,1728 ; 5937,1729 5939,1729 ; 5937,1786 5944,1786 ; 5937,1787 5942,1787 ; 5937,1788 5941,1788 ; 5937,1809 5939,1809 ; 5937,1810 5940,1810 ; 5937,1820 5944,1820 ; 5938,1486 5945,1486 ; 5938,1487 5944,1487 ; 5938,1497 5945,1497 ; 5938,1524 5943,1524 ; 5938,1537 5945,1537 ; 5938,1548 5945,1548 ; 5938,1559 5946,1559 ; 5938,1568 5945,1568 ; 5938,1576 5941,1576 ; 5938,1577 5940,1577 ; 5938,1578 5940,1578 ; 5938,1590 6000,1590 ; 5938,1591 5999,1591 ; 5938,1592 5998,1592 ; 5938,1716 6017,1716 ; 5938,1717 6016,1717 ; 5938,1730 5940,1730 ; 5938,1731 5940,1731 ; 5938,1785 5945,1785 ; 5938,1789 5940,1789 ; 5938,1811 5941,1811 ; 5938,1821 5945,1821 ; 5939,1496 5943,1496 ; 5939,1511 5944,1511 ; 5939,1525 5944,1525 ; 5939,1575 5941,1575 ; 5939,1588 6002,1588 ; 5939,1589 6001,1589 ; 5939,1718 6015,1718 ; 5939,1719 6014,1719 ; 5939,1720 6013,1720 ; 5939,1732 5941,1732 ; 5939,1733 5941,1733 ; 5939,1784 5946,1784 ; 5939,1812 5942,1812 ; 5939,1822 5946,1822 ; 5940,1485 5946,1485 ; 5940,1495 5943,1495 ; 5940,1512 5945,1512 ; 5940,1526 5946,1526 ; 5940,1538 5946,1538 ; 5940,1549 5946,1549 ; 5940,1569 5944,1569 ; 5940,1573 5942,1573 ; 5940,1574 5942,1574 ; 5940,1585 6005,1585 ; 5940,1586 6004,1586 ; 5940,1587 6003,1587 ; 5940,1721 6012,1721 ; 5940,1722 6011,1722 ; 5940,1734 5942,1734 ; 5940,1735 5942,1735 ; 5940,1783 5947,1783 ; 5940,1813 5943,1813 ; 5940,1823 5947,1823 ; 5941,1484 5947,1484 ; 5941,1494 5943,1494 ; 5941,1498 5946,1498 ; 5941,1513 5946,1513 ; 5941,1560 5949,1560 ; 5941,1570 5944,1570 ; 5941,1571 5943,1571 ; 5941,1572 5943,1572 ; 5941,1583 6007,1583 ; 5941,1584 6006,1584 ; 5941,1723 6010,1723 ; 5941,1724 6010,1724 ; 5941,1736 5943,1736 ; 5941,1737 5943,1737 ; 5941,1782 5948,1782 ; 5941,1814 5944,1814 ; 5941,1824 5948,1824 ; 5942,1483 5948,1483 ; 5942,1493 5944,1493 ; 5942,1499 5947,1499 ; 5942,1514 5947,1514 ; 5942,1527 5947,1527 ; 5942,1539 5948,1539 ; 5942,1550 5948,1550 ; 5942,1581 6009,1581 ; 5942,1582 6008,1582 ; 5942,1725 6011,1725 ; 5942,1726 6012,1726 ; 5942,1727 6013,1727 ; 5942,1738 5944,1738 ; 5942,1739 5945,1739 ; 5942,1781 5949,1781 ; 5942,1815 5945,1815 ; 5942,1825 5949,1825 ; 5943,1482 5949,1482 ; 5943,1492 5945,1492 ; 5943,1500 5948,1500 ; 5943,1528 5949,1528 ; 5943,1561 5949,1561 ; 5943,1566 5946,1566 ; 5943,1579 6011,1579 ; 5943,1580 6010,1580 ; 5943,1728 6014,1728 ; 5943,1729 6015,1729 ; 5943,1740 5945,1740 ; 5943,1741 5946,1741 ; 5943,1816 5946,1816 ; 5943,1826 5950,1826 ; 5944,1481 5951,1481 ; 5944,1491 5946,1491 ; 5944,1501 5949,1501 ; 5944,1515 5949,1515 ; 5944,1540 5949,1540 ; 5944,1551 5950,1551 ; 5944,1565 5946,1565 ; 5944,1576 6014,1576 ; 5944,1577 6013,1577 ; 5944,1578 6012,1578 ; 5944,1730 6016,1730 ; 5944,1731 6017,1731 ; 5944,1742 5946,1742 ; 5944,1780 5950,1780 ; 5945,1480 5952,1480 ; 5945,1490 5948,1490 ; 5945,1502 5950,1502 ; 5945,1516 5950,1516 ; 5945,1529 5950,1529 ; 5945,1541 5951,1541 ; 5945,1552 5955,1552 ; 5945,1562 5948,1562 ; 5945,1563 5947,1563 ; 5945,1564 5947,1564 ; 5945,1575 6015,1575 ; 5945,1732 6018,1732 ; 5945,1733 6019,1733 ; 5945,1743 5947,1743 ; 5945,1744 5947,1744 ; 5945,1758 5946,1758 ; 5945,1779 5952,1779 ; 5945,1817 5947,1817 ; 5945,1818 5948,1818 ; 5945,1827 5951,1827 ; 5946,1479 5953,1479 ; 5946,1489 5953,1489 ; 5946,1503 5951,1503 ; 5946,1517 5951,1517 ; 5946,1530 5951,1530 ; 5946,1573 6017,1573 ; 5946,1574 6016,1574 ; 5946,1734 6020,1734 ; 5946,1735 6021,1735 ; 5946,1745 5948,1745 ; 5946,1746 5949,1746 ; 5946,1778 5953,1778 ; 5946,1828 5953,1828 ; 5947,1478 5954,1478 ; 5947,1488 5952,1488 ; 5947,1504 5952,1504 ; 5947,1518 5952,1518 ; 5947,1531 5953,1531 ; 5947,1542 5953,1542 ; 5947,1553 5954,1553 ; 5947,1559 5950,1559 ; 5947,1571 6037,1571 ; 5947,1572 6018,1572 ; 5947,1736 6022,1736 ; 5947,1747 5949,1747 ; 5947,1777 5954,1777 ; 5947,1819 5949,1819 ; 5947,1829 5954,1829 ; 5948,1477 5955,1477 ; 5948,1487 5951,1487 ; 5948,1505 5953,1505 ; 5948,1519 5954,1519 ; 5948,1543 5954,1543 ; 5948,1558 5951,1558 ; 5948,1569 6036,1569 ; 5948,1570 6037,1570 ; 5948,1737 6023,1737 ; 5948,1738 6024,1738 ; 5948,1748 5950,1748 ; 5948,1749 5950,1749 ; 5948,1776 5961,1776 ; 5948,1820 5950,1820 ; 5948,1830 5955,1830 ; 5949,1486 5952,1486 ; 5949,1490 5954,1490 ; 5949,1506 5954,1506 ; 5949,1532 5954,1532 ; 5949,1554 5953,1554 ; 5949,1557 5951,1557 ; 5949,1567 6034,1567 ; 5949,1568 6035,1568 ; 5949,1739 6025,1739 ; 5949,1740 6026,1740 ; 5949,1750 5951,1750 ; 5949,1751 5952,1751 ; 5949,1775 5960,1775 ; 5949,1821 5951,1821 ; 5949,1831 5956,1831 ; 5950,1476 5957,1476 ; 5950,1485 5953,1485 ; 5950,1491 5955,1491 ; 5950,1520 5955,1520 ; 5950,1533 5956,1533 ; 5950,1544 5956,1544 ; 5950,1555 5952,1555 ; 5950,1556 5952,1556 ; 5950,1566 6033,1566 ; 5950,1741 6027,1741 ; 5950,1742 6028,1742 ; 5950,1752 5952,1752 ; 5950,1822 5953,1822 ; 5950,1832 5957,1832 ; 5951,1475 5958,1475 ; 5951,1484 5954,1484 ; 5951,1492 5956,1492 ; 5951,1507 5955,1507 ; 5951,1521 5956,1521 ; 5951,1534 5957,1534 ; 5951,1545 5960,1545 ; 5951,1564 6030,1564 ; 5951,1565 6031,1565 ; 5951,1743 6029,1743 ; 5951,1744 6030,1744 ; 5951,1753 5953,1753 ; 5951,1754 5954,1754 ; 5951,1774 5959,1774 ; 5951,1823 5954,1823 ; 5951,1833 5959,1833 ; 5952,1474 5959,1474 ; 5952,1483 5955,1483 ; 5952,1493 5957,1493 ; 5952,1508 5956,1508 ; 5952,1522 5957,1522 ; 5952,1562 6030,1562 ; 5952,1563 6030,1563 ; 5952,1745 6031,1745 ; 5952,1755 5954,1755 ; 5952,1773 5958,1773 ; 5952,1824 5955,1824 ; 5953,1473 5960,1473 ; 5953,1494 5958,1494 ; 5953,1509 5958,1509 ; 5953,1523 5958,1523 ; 5953,1535 5958,1535 ; 5953,1546 5959,1546 ; 5953,1551 5955,1551 ; 5953,1560 6032,1560 ; 5953,1561 6031,1561 ; 5953,1746 6032,1746 ; 5953,1747 6033,1747 ; 5953,1756 5955,1756 ; 5953,1757 5956,1757 ; 5953,1772 5957,1772 ; 5953,1825 5956,1825 ; 5953,1834 5960,1834 ; 5954,1472 5962,1472 ; 5954,1482 5961,1482 ; 5954,1495 5959,1495 ; 5954,1510 5959,1510 ; 5954,1536 5960,1536 ; 5954,1549 5957,1549 ; 5954,1550 5956,1550 ; 5954,1559 6033,1559 ; 5954,1748 6034,1748 ; 5954,1758 5956,1758 ; 5954,1771 5956,1771 ; 5954,1826 5957,1826 ; 5954,1835 5961,1835 ; 5955,1481 5961,1481 ; 5955,1496 5960,1496 ; 5955,1511 5960,1511 ; 5955,1524 5960,1524 ; 5955,1547 5958,1547 ; 5955,1548 5957,1548 ; 5955,1557 6035,1557 ; 5955,1558 6034,1558 ; 5955,1749 6035,1749 ; 5955,1750 6036,1750 ; 5955,1759 5957,1759 ; 5955,1827 5959,1827 ; 5955,1836 5962,1836 ; 5956,1471 5963,1471 ; 5956,1480 5960,1480 ; 5956,1497 5960,1497 ; 5956,1512 5961,1512 ; 5956,1525 5961,1525 ; 5956,1537 5961,1537 ; 5956,1556 6036,1556 ; 5956,1751 6037,1751 ; 5956,1760 5958,1760 ; 5956,1761 5959,1761 ; 5956,1837 5964,1837 ; 5957,1470 5964,1470 ; 5957,1479 5960,1479 ; 5957,1498 5961,1498 ; 5957,1513 5962,1513 ; 5957,1526 5962,1526 ; 5957,1538 5965,1538 ; 5957,1555 6037,1555 ; 5957,1752 6038,1752 ; 5957,1753 6039,1753 ; 5957,1762 5959,1762 ; 5957,1777 5961,1777 ; 5957,1828 5960,1828 ; 5958,1469 5966,1469 ; 5958,1478 5961,1478 ; 5958,1483 5962,1483 ; 5958,1499 5962,1499 ; 5958,1514 5963,1514 ; 5958,1527 5963,1527 ; 5958,1539 5964,1539 ; 5958,1544 5960,1544 ; 5958,1553 6039,1553 ; 5958,1554 6038,1554 ; 5958,1754 6040,1754 ; 5958,1763 5960,1763 ; 5958,1764 5961,1764 ; 5958,1778 5962,1778 ; 5958,1779 5963,1779 ; 5958,1829 5961,1829 ; 5958,1838 5965,1838 ; 5959,1468 5967,1468 ; 5959,1484 5963,1484 ; 5959,1500 5963,1500 ; 5959,1515 5964,1515 ; 5959,1543 5961,1543 ; 5959,1552 6040,1552 ; 5959,1755 6041,1755 ; 5959,1756 6042,1756 ; 5959,1765 5962,1765 ; 5959,1780 5964,1780 ; 5959,1830 5962,1830 ; 5959,1839 5966,1839 ; 5960,1477 5963,1477 ; 5960,1485 5964,1485 ; 5960,1501 5964,1501 ; 5960,1516 5965,1516 ; 5960,1528 5965,1528 ; 5960,1540 5964,1540 ; 5960,1541 5963,1541 ; 5960,1542 5962,1542 ; 5960,1550 6042,1550 ; 5960,1551 6041,1551 ; 5960,1757 6043,1757 ; 5960,1766 5963,1766 ; 5960,1781 5965,1781 ; 5960,1831 5963,1831 ; 5960,1840 5968,1840 ; 5961,1467 5968,1467 ; 5961,1476 5964,1476 ; 5961,1486 5965,1486 ; 5961,1502 5965,1502 ; 5961,1517 5966,1517 ; 5961,1529 5966,1529 ; 5961,1549 6043,1549 ; 5961,1758 6044,1758 ; 5961,1767 5963,1767 ; 5961,1782 5966,1782 ; 5962,1466 5969,1466 ; 5962,1475 5970,1475 ; 5962,1487 5966,1487 ; 5962,1488 5967,1488 ; 5962,1503 5966,1503 ; 5962,1518 5967,1518 ; 5962,1530 5967,1530 ; 5962,1548 6044,1548 ; 5962,1759 6045,1759 ; 5962,1760 6046,1760 ; 5962,1768 5964,1768 ; 5962,1783 5967,1783 ; 5962,1832 5965,1832 ; 5962,1841 5969,1841 ; 5963,1465 5971,1465 ; 5963,1474 5969,1474 ; 5963,1489 5967,1489 ; 5963,1504 5967,1504 ; 5963,1519 5968,1519 ; 5963,1531 5972,1531 ; 5963,1546 6046,1546 ; 5963,1547 6045,1547 ; 5963,1761 6047,1761 ; 5963,1769 5965,1769 ; 5963,1770 5966,1770 ; 5963,1784 5966,1784 ; 5963,1833 5966,1833 ; 5963,1842 5970,1842 ; 5964,1490 5968,1490 ; 5964,1505 5968,1505 ; 5964,1532 5971,1532 ; 5964,1537 5966,1537 ; 5964,1545 6047,1545 ; 5964,1762 6048,1762 ; 5964,1771 5967,1771 ; 5964,1785 5965,1785 ; 5964,1834 5967,1834 ; 5964,1843 5972,1843 ; 5965,1464 5972,1464 ; 5965,1473 5969,1473 ; 5965,1491 5969,1491 ; 5965,1506 5969,1506 ; 5965,1507 5970,1507 ; 5965,1520 5969,1520 ; 5965,1535 5968,1535 ; 5965,1536 5967,1536 ; 5965,1544 6048,1544 ; 5965,1763 6049,1763 ; 5965,1764 6050,1764 ; 5965,1772 5968,1772 ; 5966,1463 5974,1463 ; 5966,1472 5969,1472 ; 5966,1492 5970,1492 ; 5966,1508 5971,1508 ; 5966,1521 5970,1521 ; 5966,1533 5970,1533 ; 5966,1534 5969,1534 ; 5966,1543 6049,1543 ; 5966,1765 6051,1765 ; 5966,1773 5969,1773 ; 5966,1835 5969,1835 ; 5966,1844 5973,1844 ; 5967,1462 5975,1462 ; 5967,1476 5971,1476 ; 5967,1477 5972,1477 ; 5967,1493 5971,1493 ; 5967,1494 5972,1494 ; 5967,1509 5972,1509 ; 5967,1522 5971,1522 ; 5967,1541 6051,1541 ; 5967,1542 6050,1542 ; 5967,1766 6052,1766 ; 5967,1774 5969,1774 ; 5967,1836 5970,1836 ; 5967,1845 5975,1845 ; 5968,1471 5971,1471 ; 5968,1478 5972,1478 ; 5968,1495 5972,1495 ; 5968,1510 5973,1510 ; 5968,1523 5973,1523 ; 5968,1540 6052,1540 ; 5968,1767 6053,1767 ; 5968,1775 5970,1775 ; 5968,1837 5972,1837 ; 5969,1461 5977,1461 ; 5969,1470 5972,1470 ; 5969,1479 5973,1479 ; 5969,1496 5973,1496 ; 5969,1511 5974,1511 ; 5969,1524 5974,1524 ; 5969,1539 6053,1539 ; 5969,1768 6054,1768 ; 5969,1776 5971,1776 ; 5969,1846 5976,1846 ; 5970,1460 5979,1460 ; 5970,1469 5973,1469 ; 5970,1480 5974,1480 ; 5970,1497 5974,1497 ; 5970,1512 5975,1512 ; 5970,1525 5978,1525 ; 5970,1530 5973,1530 ; 5970,1538 6054,1538 ; 5970,1769 6055,1769 ; 5970,1777 5972,1777 ; 5970,1778 5973,1778 ; 5970,1838 5973,1838 ; 5970,1847 5978,1847 ; 5971,1481 5974,1481 ; 5971,1482 5975,1482 ; 5971,1498 5975,1498 ; 5971,1513 5976,1513 ; 5971,1526 5976,1526 ; 5971,1529 5973,1529 ; 5971,1537 6055,1537 ; 5971,1770 6056,1770 ; 5971,1771 6057,1771 ; 5971,1839 5975,1839 ; 5971,1848 5979,1848 ; 5972,1459 5980,1459 ; 5972,1468 5975,1468 ; 5972,1483 5976,1483 ; 5972,1499 5976,1499 ; 5972,1500 5977,1500 ; 5972,1514 5977,1514 ; 5972,1527 5975,1527 ; 5972,1528 5974,1528 ; 5972,1536 6056,1536 ; 5972,1772 6058,1772 ; 5972,1779 5974,1779 ; 5973,1458 5982,1458 ; 5973,1467 5976,1467 ; 5973,1484 5977,1484 ; 5973,1485 5978,1485 ; 5973,1501 5978,1501 ; 5973,1515 5978,1515 ; 5973,1535 6057,1535 ; 5973,1773 6059,1773 ; 5973,1780 5975,1780 ; 5973,1781 5976,1781 ; 5973,1840 5976,1840 ; 5973,1849 5981,1849 ; 5974,1486 5978,1486 ; 5974,1502 5978,1502 ; 5974,1516 5978,1516 ; 5974,1533 6059,1533 ; 5974,1534 6058,1534 ; 5974,1774 6060,1774 ; 5974,1841 5977,1841 ; 5975,1457 5983,1457 ; 5975,1466 5978,1466 ; 5975,1487 5979,1487 ; 5975,1503 5979,1503 ; 5975,1517 5979,1517 ; 5975,1532 6060,1532 ; 5975,1775 6061,1775 ; 5975,1782 5977,1782 ; 5975,1783 5978,1783 ; 5975,1842 5979,1842 ; 5975,1850 5983,1850 ; 5976,1465 5979,1465 ; 5976,1488 5980,1488 ; 5976,1489 5981,1489 ; 5976,1504 5980,1504 ; 5976,1505 5981,1505 ; 5976,1518 5980,1518 ; 5976,1524 5979,1524 ; 5976,1531 6061,1531 ; 5976,1776 6062,1776 ; 5976,1784 5979,1784 ; 5976,1851 5984,1851 ; 5977,1456 5985,1456 ; 5977,1490 5981,1490 ; 5977,1506 5982,1506 ; 5977,1519 5984,1519 ; 5977,1523 5980,1523 ; 5977,1530 6062,1530 ; 5977,1777 6063,1777 ; 5977,1785 5980,1785 ; 5977,1843 5980,1843 ; 5978,1455 5987,1455 ; 5978,1464 5981,1464 ; 5978,1491 5982,1491 ; 5978,1507 5983,1507 ; 5978,1520 5983,1520 ; 5978,1521 5982,1521 ; 5978,1522 5981,1522 ; 5978,1529 6063,1529 ; 5978,1778 6064,1778 ; 5978,1852 5986,1852 ; 5979,1463 5982,1463 ; 5979,1492 5983,1492 ; 5979,1508 5983,1508 ; 5979,1528 6064,1528 ; 5979,1779 6065,1779 ; 5979,1786 5981,1786 ; 5979,1844 5982,1844 ; 5979,1853 5988,1853 ; 5980,1454 5988,1454 ; 5980,1493 5983,1493 ; 5980,1494 5984,1494 ; 5980,1509 5984,1509 ; 5980,1780 6066,1780 ; 5980,1787 5983,1787 ; 5980,1845 5984,1845 ; 5981,1453 5990,1453 ; 5981,1462 5984,1462 ; 5981,1495 5985,1495 ; 5981,1510 5985,1510 ; 5981,1526 6066,1526 ; 5981,1527 6064,1527 ; 5981,1781 6067,1781 ; 5981,1788 5984,1788 ; 5981,1854 5990,1854 ; 5982,1461 5985,1461 ; 5982,1496 5986,1496 ; 5982,1497 5986,1497 ; 5982,1511 5986,1511 ; 5982,1512 5987,1512 ; 5982,1518 5985,1518 ; 5982,1782 6068,1782 ; 5982,1789 5985,1789 ; 5982,1846 5985,1846 ; 5983,1452 5992,1452 ; 5983,1498 5987,1498 ; 5983,1513 5991,1513 ; 5983,1525 6067,1525 ; 5983,1783 6069,1783 ; 5983,1790 5986,1790 ; 5983,1847 5987,1847 ; 5983,1855 5991,1855 ; 5984,1460 5988,1460 ; 5984,1499 5988,1499 ; 5984,1514 5990,1514 ; 5984,1517 5986,1517 ; 5984,1524 6067,1524 ; 5984,1791 5987,1791 ; 5984,1856 5993,1856 ; 5985,1451 5994,1451 ; 5985,1459 5989,1459 ; 5985,1500 5989,1500 ; 5985,1501 5989,1501 ; 5985,1515 5989,1515 ; 5985,1516 5988,1516 ; 5985,1523 6069,1523 ; 5985,1784 6070,1784 ; 5985,1792 5989,1792 ; 5985,1848 5989,1848 ; 5986,1450 5996,1450 ; 5986,1502 5990,1502 ; 5986,1522 6069,1522 ; 5986,1785 6071,1785 ; 5986,1857 5995,1857 ; 5987,1458 5991,1458 ; 5987,1503 5991,1503 ; 5987,1521 6071,1521 ; 5987,1786 6072,1786 ; 5987,1793 5990,1793 ; 5987,1849 5990,1849 ; 5988,1449 5998,1449 ; 5988,1504 5992,1504 ; 5988,1505 5992,1505 ; 5988,1520 6071,1520 ; 5988,1787 6073,1787 ; 5988,1794 5991,1794 ; 5988,1850 5992,1850 ; 5988,1858 5997,1858 ; 5989,1457 5993,1457 ; 5989,1506 5993,1506 ; 5989,1519 6072,1519 ; 5989,1788 6074,1788 ; 5989,1795 5992,1795 ; 5989,1827 6012,1827 ; 5989,1828 5994,1828 ; 5989,1829 5993,1829 ; 5989,1830 5993,1830 ; 5989,1831 5993,1831 ; 5989,1832 5993,1832 ; 5990,1448 5999,1448 ; 5990,1507 5994,1507 ; 5990,1512 5993,1512 ; 5990,1789 6075,1789 ; 5990,1796 5994,1796 ; 5990,1826 6013,1826 ; 5990,1833 5994,1833 ; 5990,1834 5996,1834 ; 5990,1851 5994,1851 ; 5990,1859 5999,1859 ; 5991,1456 5994,1456 ; 5991,1508 5998,1508 ; 5991,1509 5997,1509 ; 5991,1510 5995,1510 ; 5991,1511 5994,1511 ; 5991,1518 6073,1518 ; 5991,1646 6050,1646 ; 5991,1647 6051,1647 ; 5991,1648 6052,1648 ; 5991,1649 6053,1649 ; 5991,1650 6054,1650 ; 5991,1651 6055,1651 ; 5991,1652 6056,1652 ; 5991,1653 6057,1653 ; 5991,1654 6079,1654 ; 5991,1655 6078,1655 ; 5991,1656 6077,1656 ; 5991,1657 6076,1657 ; 5991,1790 6076,1790 ; 5991,1825 6003,1825 ; 5991,1835 5997,1835 ; 5991,1860 6001,1860 ; 5992,1447 6002,1447 ; 5992,1517 6074,1517 ; 5992,1644 6048,1644 ; 5992,1645 6049,1645 ; 5992,1658 6075,1658 ; 5992,1659 6074,1659 ; 5992,1797 5995,1797 ; 5992,1836 6006,1836 ; 5992,1852 5996,1852 ; 5993,1455 5996,1455 ; 5993,1516 6075,1516 ; 5993,1642 6046,1642 ; 5993,1643 6047,1643 ; 5993,1660 6073,1660 ; 5993,1661 6032,1661 ; 5993,1791 6077,1791 ; 5993,1798 5996,1798 ; 5993,1824 5998,1824 ; 5993,1861 6003,1861 ; 5994,1446 6004,1446 ; 5994,1454 5998,1454 ; 5994,1515 6076,1515 ; 5994,1641 6045,1641 ; 5994,1662 6031,1662 ; 5994,1663 6030,1663 ; 5994,1792 6078,1792 ; 5994,1799 5998,1799 ; 5994,1837 6005,1837 ; 5994,1853 5998,1853 ; 5995,1640 6044,1640 ; 5995,1664 6029,1664 ; 5995,1665 6028,1665 ; 5995,1793 6079,1793 ; 5995,1816 6010,1816 ; 5995,1817 6001,1817 ; 5995,1838 6004,1838 ; 5995,1854 6000,1854 ; 5995,1862 6005,1862 ; 5996,1445 6006,1445 ; 5996,1453 6000,1453 ; 5996,1507 6000,1507 ; 5996,1514 6077,1514 ; 5996,1638 6042,1638 ; 5996,1639 6043,1639 ; 5996,1666 6027,1666 ; 5996,1800 5999,1800 ; 5996,1815 6008,1815 ; 5997,1506 6001,1506 ; 5997,1513 6078,1513 ; 5997,1637 6041,1637 ; 5997,1667 6026,1667 ; 5997,1794 6080,1794 ; 5997,1801 6000,1801 ; 5997,1814 6007,1814 ; 5997,1818 5999,1818 ; 5997,1855 6002,1855 ; 5997,1863 6008,1863 ; 5998,1444 6008,1444 ; 5998,1452 6002,1452 ; 5998,1512 6079,1512 ; 5998,1636 6040,1636 ; 5998,1668 6025,1668 ; 5998,1795 6081,1795 ; 5998,1802 6002,1802 ; 5998,1828 6011,1828 ; 5999,1505 6002,1505 ; 5999,1635 6039,1635 ; 5999,1669 6024,1669 ; 5999,1796 6082,1796 ; 5999,1839 6001,1839 ; 5999,1856 6003,1856 ; 5999,1864 6009,1864 ; 6000,1443 6010,1443 ; 6000,1451 6004,1451 ; 6000,1504 6004,1504 ; 6000,1511 6080,1511 ; 6000,1634 6038,1634 ; 6000,1670 6023,1670 ; 6000,1803 6004,1803 ; 6000,1813 6003,1813 ; 6001,1510 6082,1510 ; 6001,1633 6037,1633 ; 6001,1671 6022,1671 ; 6001,1713 6020,1713 ; 6001,1797 6083,1797 ; 6001,1804 6005,1804 ; 6001,1829 6010,1829 ; 6001,1835 6004,1835 ; 6001,1865 6012,1865 ; 6002,1442 6013,1442 ; 6002,1450 6006,1450 ; 6002,1472 6004,1472 ; 6002,1473 6005,1473 ; 6002,1474 6006,1474 ; 6002,1475 6008,1475 ; 6002,1476 6024,1476 ; 6002,1477 6005,1477 ; 6002,1503 6005,1503 ; 6002,1632 6036,1632 ; 6002,1672 6021,1672 ; 6002,1712 6021,1712 ; 6002,1798 6084,1798 ; 6002,1834 6003,1834 ; 6002,1857 6006,1857 ; 6003,1478 6005,1478 ; 6003,1502 6007,1502 ; 6003,1509 6083,1509 ; 6003,1631 6035,1631 ; 6003,1673 6020,1673 ; 6003,1674 6019,1674 ; 6003,1711 6022,1711 ; 6003,1805 6006,1805 ; 6003,1858 6008,1858 ; 6004,1441 6015,1441 ; 6004,1449 6008,1449 ; 6004,1456 6006,1456 ; 6004,1457 6007,1457 ; 6004,1458 6007,1458 ; 6004,1508 6084,1508 ; 6004,1630 6034,1630 ; 6004,1710 6023,1710 ; 6004,1799 6086,1799 ; 6004,1806 6008,1806 ; 6004,1866 6014,1866 ; 6005,1459 6008,1459 ; 6005,1460 6009,1460 ; 6005,1501 6008,1501 ; 6005,1629 6033,1629 ; 6005,1675 6018,1675 ; 6005,1709 6024,1709 ; 6005,1800 6087,1800 ; 6005,1817 6011,1817 ; 6005,1867 6017,1867 ; 6006,1440 6018,1440 ; 6006,1448 6010,1448 ; 6006,1461 6009,1461 ; 6006,1462 6010,1462 ; 6006,1507 6086,1507 ; 6006,1628 6032,1628 ; 6006,1676 6017,1676 ; 6006,1708 6025,1708 ; 6006,1807 6010,1807 ; 6006,1818 6012,1818 ; 6006,1859 6010,1859 ; 6007,1463 6010,1463 ; 6007,1500 6010,1500 ; 6007,1506 6088,1506 ; 6007,1627 6031,1627 ; 6007,1677 6016,1677 ; 6007,1678 6015,1678 ; 6007,1707 6026,1707 ; 6007,1801 6089,1801 ; 6008,1447 6013,1447 ; 6008,1464 6011,1464 ; 6008,1465 6012,1465 ; 6008,1468 6021,1468 ; 6008,1469 6021,1469 ; 6008,1477 6021,1477 ; 6008,1499 6012,1499 ; 6008,1626 6030,1626 ; 6008,1706 6027,1706 ; 6008,1802 6092,1802 ; 6008,1808 6011,1808 ; 6008,1819 6012,1819 ; 6008,1825 6013,1825 ; 6008,1860 6012,1860 ; 6008,1868 6019,1868 ; 6009,1439 6020,1439 ; 6009,1466 6012,1466 ; 6009,1467 6022,1467 ; 6009,1505 6091,1505 ; 6009,1625 6029,1625 ; 6009,1679 6014,1679 ; 6009,1680 6013,1680 ; 6009,1705 6028,1705 ; 6009,1809 6013,1809 ; 6009,1820 6013,1820 ; 6009,1821 6013,1821 ; 6009,1822 6014,1822 ; 6009,1823 6014,1823 ; 6009,1824 6013,1824 ; 6010,1470 6023,1470 ; 6010,1498 6014,1498 ; 6010,1504 6093,1504 ; 6010,1624 6028,1624 ; 6010,1681 6012,1681 ; 6010,1704 6029,1704 ; 6010,1803 6096,1803 ; 6010,1861 6015,1861 ; 6010,1869 6022,1869 ; 6011,1438 6023,1438 ; 6011,1446 6015,1446 ; 6011,1471 6019,1471 ; 6011,1623 6027,1623 ; 6011,1703 6030,1703 ; 6011,1804 6192,1804 ; 6011,1810 6015,1810 ; 6012,1472 6017,1472 ; 6012,1497 6016,1497 ; 6012,1503 6097,1503 ; 6012,1622 6026,1622 ; 6012,1702 6031,1702 ; 6012,1862 6017,1862 ; 6012,1870 6025,1870 ; 6013,1445 6017,1445 ; 6013,1473 6017,1473 ; 6013,1474 6018,1474 ; 6013,1475 6019,1475 ; 6013,1496 6017,1496 ; 6013,1621 6025,1621 ; 6013,1701 6032,1701 ; 6013,1805 6190,1805 ; 6013,1811 6017,1811 ; 6014,1437 6025,1437 ; 6014,1502 6190,1502 ; 6014,1620 6024,1620 ; 6014,1700 6033,1700 ; 6015,1478 6021,1478 ; 6015,1495 6019,1495 ; 6015,1501 6188,1501 ; 6015,1619 6023,1619 ; 6015,1699 6034,1699 ; 6015,1806 6188,1806 ; 6015,1812 6019,1812 ; 6015,1863 6019,1863 ; 6015,1871 6027,1871 ; 6016,1436 6029,1436 ; 6016,1444 6020,1444 ; 6016,1479 6021,1479 ; 6016,1618 6022,1618 ; 6016,1698 6035,1698 ; 6016,1813 6020,1813 ; 6017,1466 6023,1466 ; 6017,1480 6022,1480 ; 6017,1481 6023,1481 ; 6017,1494 6021,1494 ; 6017,1500 6186,1500 ; 6017,1617 6021,1617 ; 6017,1697 6036,1697 ; 6017,1807 6187,1807 ; 6017,1864 6023,1864 ; 6017,1872 6031,1872 ; 6018,1443 6023,1443 ; 6018,1482 6023,1482 ; 6018,1483 6024,1483 ; 6018,1616 6020,1616 ; 6018,1696 6037,1696 ; 6018,1814 6022,1814 ; 6019,1435 6031,1435 ; 6019,1465 6023,1465 ; 6019,1484 6023,1484 ; 6019,1493 6023,1493 ; 6019,1499 6184,1499 ; 6019,1695 6038,1695 ; 6019,1808 6185,1808 ; 6020,1471 6027,1471 ; 6020,1485 6023,1485 ; 6020,1486 6023,1486 ; 6020,1572 6038,1572 ; 6020,1694 6039,1694 ; 6020,1815 6024,1815 ; 6020,1840 6025,1840 ; 6020,1841 6024,1841 ; 6020,1842 6024,1842 ; 6020,1843 6024,1843 ; 6020,1844 6024,1844 ; 6020,1845 6025,1845 ; 6020,1865 6025,1865 ; 6021,1434 6034,1434 ; 6021,1442 6026,1442 ; 6021,1475 6026,1475 ; 6021,1492 6025,1492 ; 6021,1498 6182,1498 ; 6021,1573 6039,1573 ; 6021,1693 6040,1693 ; 6021,1809 6183,1809 ; 6021,1836 6027,1836 ; 6021,1837 6026,1837 ; 6021,1838 6026,1838 ; 6021,1839 6025,1839 ; 6021,1846 6025,1846 ; 6021,1847 6026,1847 ; 6021,1848 6026,1848 ; 6021,1873 6033,1873 ; 6022,1472 6027,1472 ; 6022,1474 6027,1474 ; 6022,1574 6041,1574 ; 6022,1692 6041,1692 ; 6022,1816 6027,1816 ; 6022,1835 6027,1835 ; 6022,1849 6028,1849 ; 6023,1441 6028,1441 ; 6023,1473 6027,1473 ; 6023,1491 6027,1491 ; 6023,1497 6180,1497 ; 6023,1575 6041,1575 ; 6023,1691 6042,1691 ; 6023,1810 6181,1810 ; 6023,1833 6029,1833 ; 6023,1834 6028,1834 ; 6023,1850 6029,1850 ; 6023,1866 6028,1866 ; 6023,1874 6037,1874 ; 6024,1433 6038,1433 ; 6024,1576 6043,1576 ; 6024,1690 6043,1690 ; 6024,1811 6179,1811 ; 6024,1817 6029,1817 ; 6024,1832 6031,1832 ; 6024,1851 6041,1851 ; 6025,1490 6030,1490 ; 6025,1496 6178,1496 ; 6025,1577 6044,1577 ; 6025,1689 6044,1689 ; 6025,1831 6042,1831 ; 6025,1852 6040,1852 ; 6025,1867 6030,1867 ; 6026,1440 6031,1440